# Altium PCB 6button-6neopixel.PcbDoc
Units mil, origin at the board's own origin, x right, y up, seen from the top; angles counter-clockwise.
Board outline 6000 x 3500 mil, 2 copper layers (Top Layer, Bottom Layer); 19 components, 14 nets, 56 pads, 0 vias.
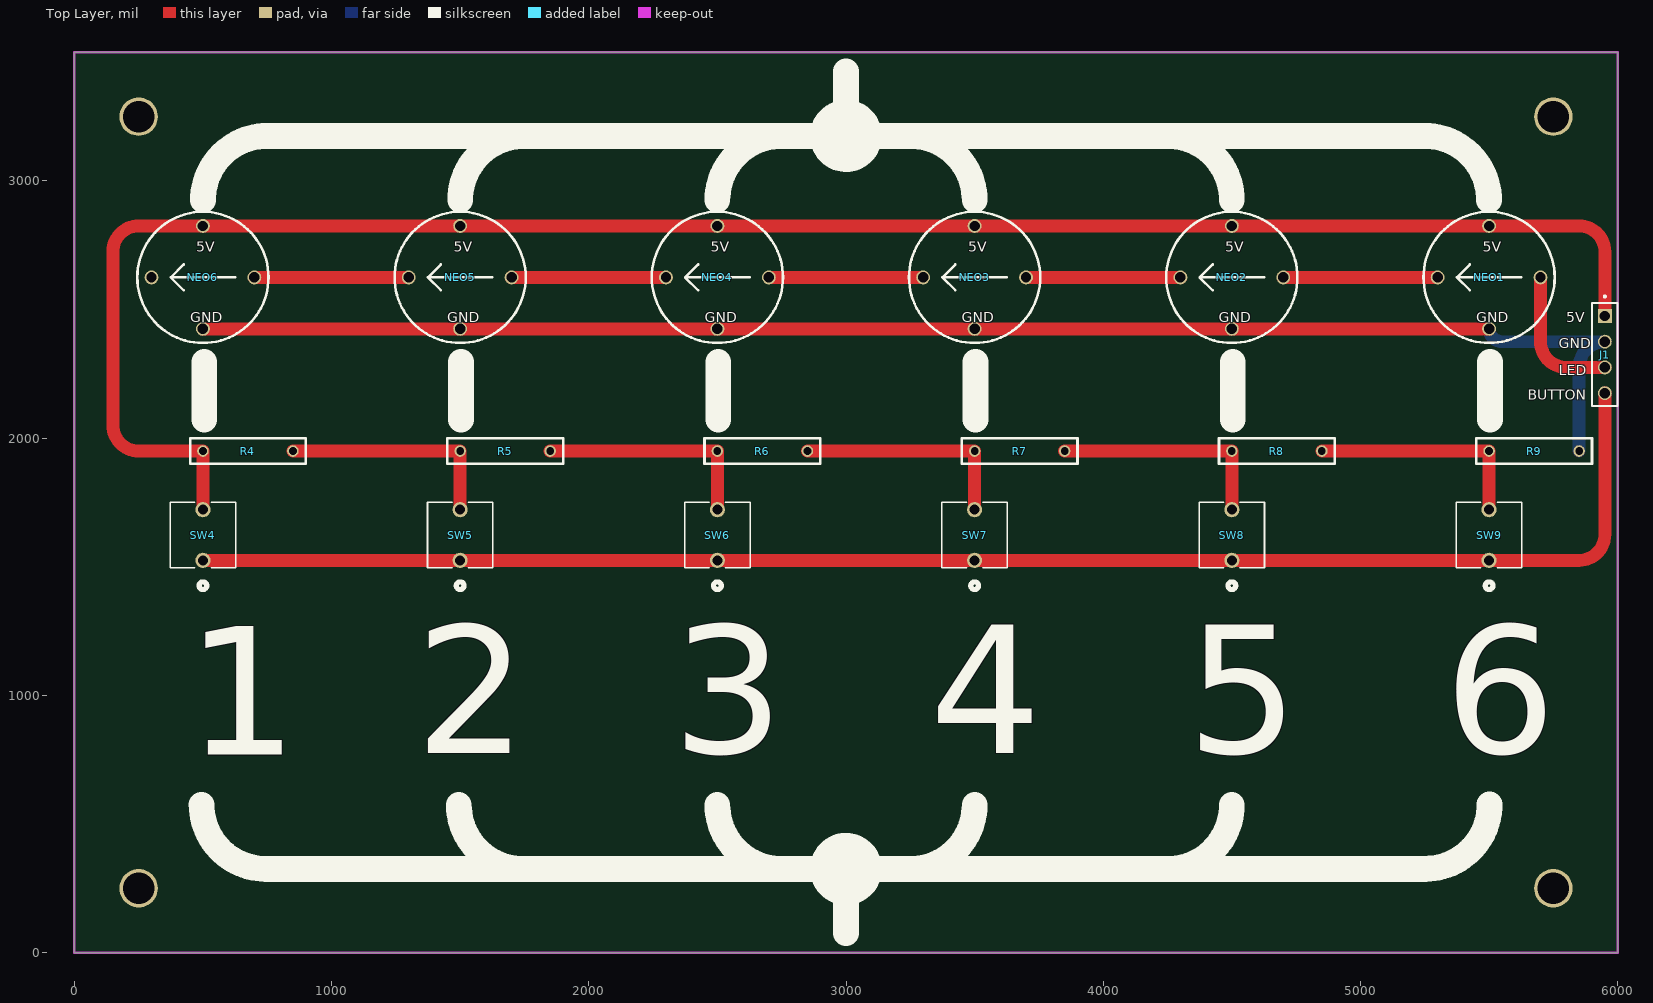
[diagram p0: Top Layer view]
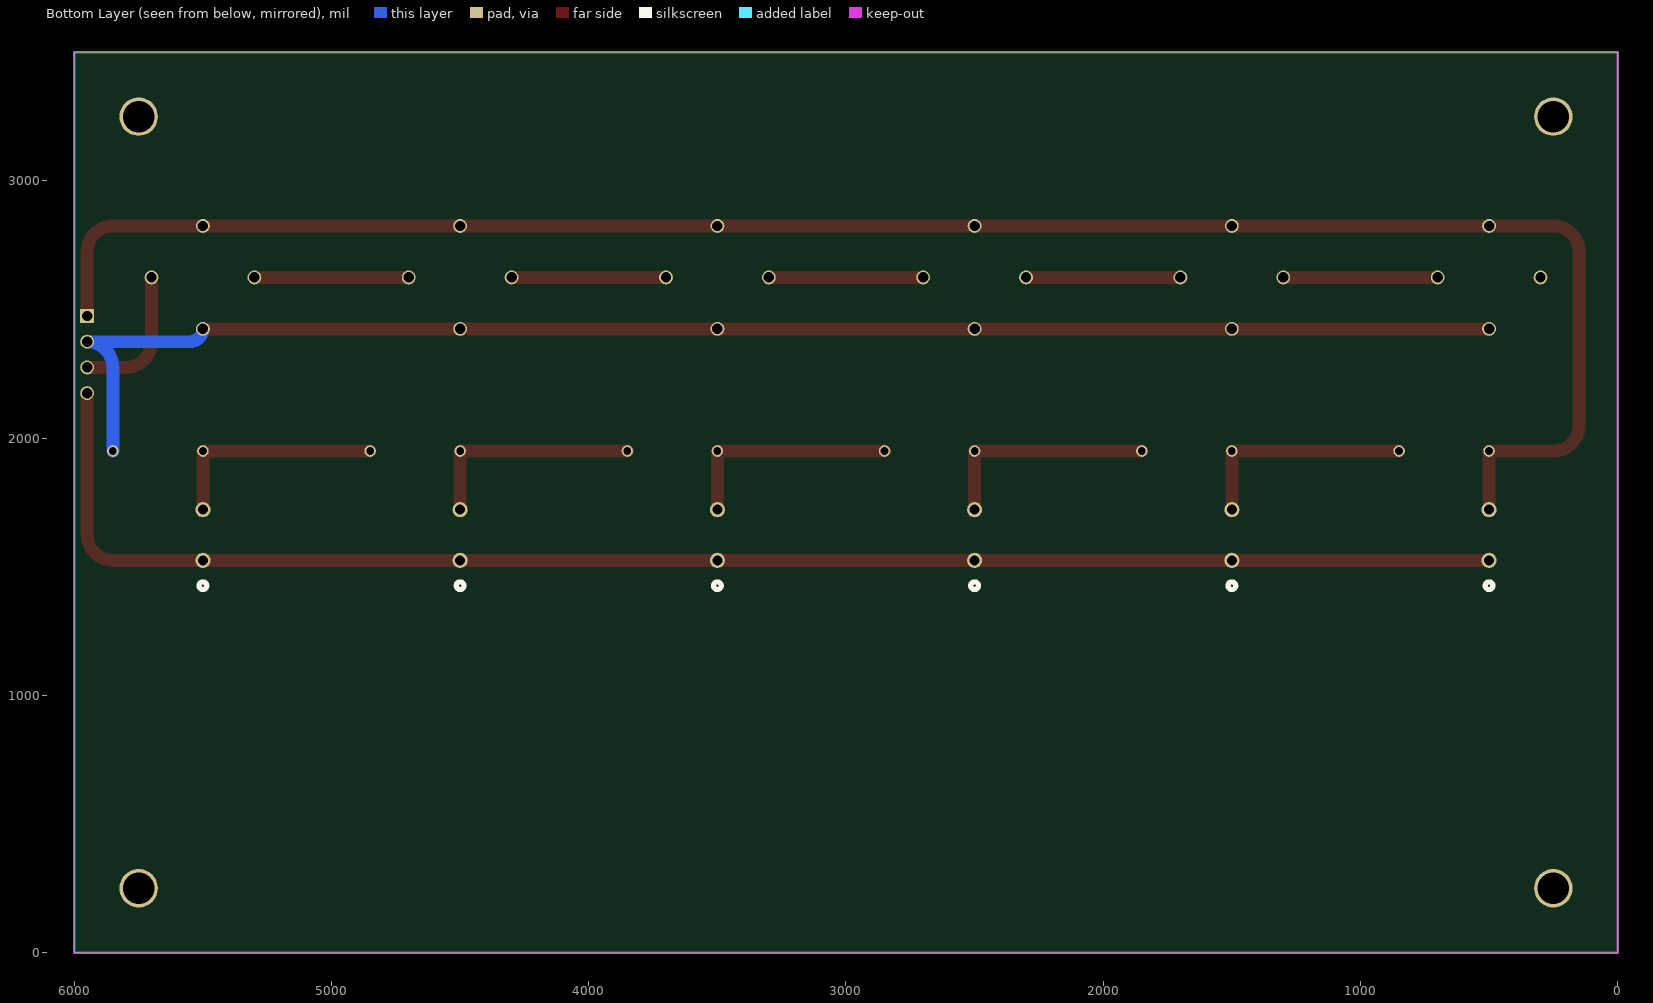
[diagram p1: Bottom Layer view, seen from below]
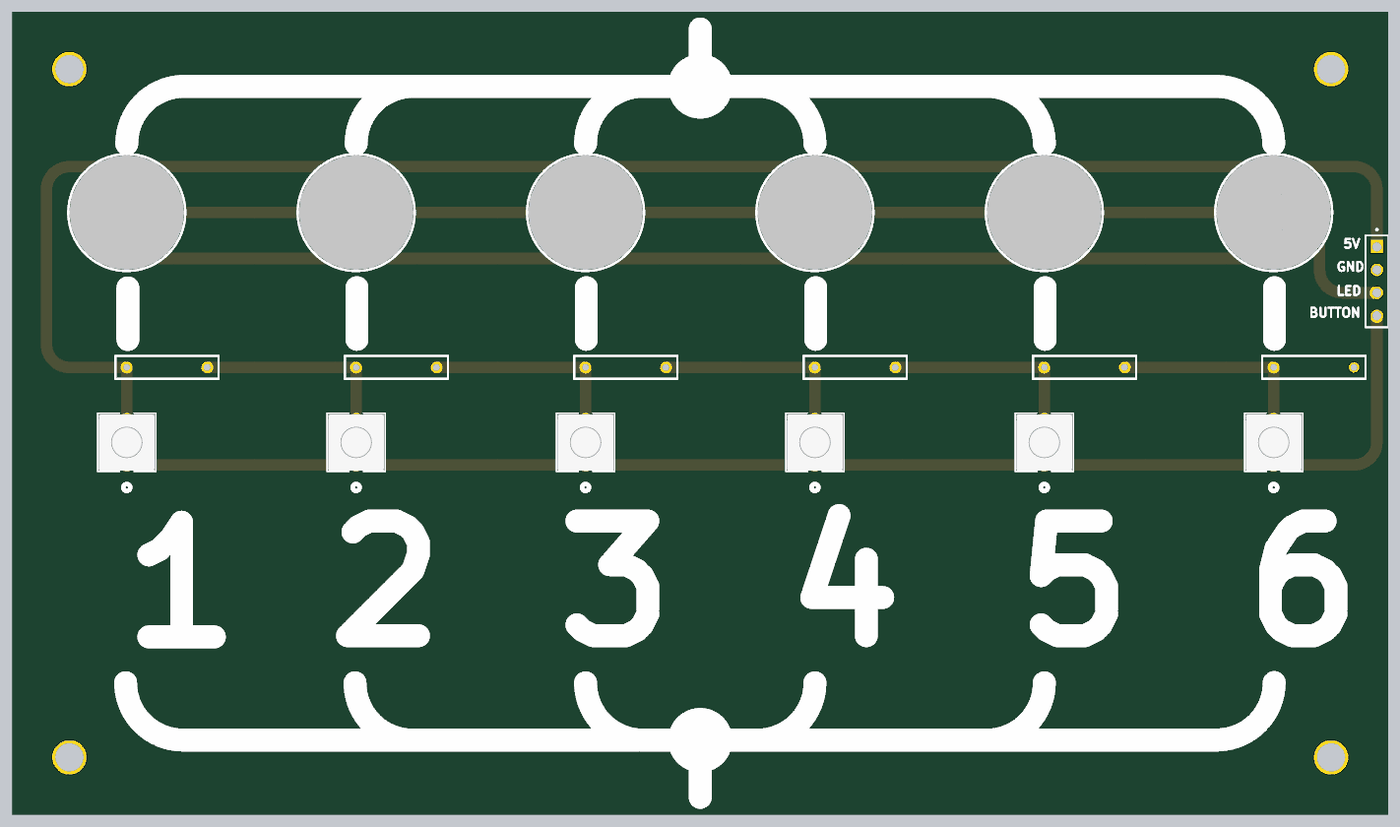
[diagram p2: 3D render of the assembled board from above, using the file's embedded part models]

## Layer stack, top to bottom
Top Solder: solder mask 0.4, Solder Resist, Dk 3.5
Top Layer: signal copper 1.4
Dielectric 1: dielectric 12.6, FR-4, Dk 4.8
Bottom Layer: signal copper 1.4
Bottom Solder: solder mask 0.4, Solder Resist, Dk 3.5

## Board outline
0,0 0,3500 6000,3500 6000,0

## Design rules (kind name [scope] priority, off if disabled: settings)
Clearance [All] p1: gap=10 ignorepadtopadclearanceinfootprint=FALSE except(0: Arc-Hole Track-Hole SMDPad-Hole THPad-Hole Via-Hole Fill-Hole Poly-Hole Region-Hole Text-Hole)
PolygonConnect [All] p1: connectstyle=Relief reliefconductorwidth=10 reliefentries=4 polygonreliefangle="90 Angle" airgapwidth=10
RoutingVias [All] p1: holewidth=28 width=50 viastyle="Through Hole" minholewidth=28 minwidth=50 maxholewidth=28 maxwidth=50
SolderMaskExpansion [All] p1: expansion=4 istentingtop=FALSE
Width [All] p1: maxlimit=150 minlimit=10 preferedwidth=50 minimp=50.000000 maximp=50.000000 favimp=50.000000
30 further rules are at their usual default settings.

## Components (designator, comment, footprint, x,y, rotation, side; value= is the part's Value field where it differs from the comment)
J1 "TSW-104-07-G-S" SAMTEC_TSW-104-07-G-S 5950,2325 r270 top
NEO1 "adafruit-1559-neopixel-flora" adafruit-1559-neopixel-flora 5500,2625 r0 top
NEO2 "adafruit-1559-neopixel-flora" adafruit-1559-neopixel-flora 4500,2625 r0 top
NEO3 "adafruit-1559-neopixel-flora" adafruit-1559-neopixel-flora 3500,2625 r0 top
NEO4 "adafruit-1559-neopixel-flora" adafruit-1559-neopixel-flora 2500,2625 r0 top
NEO5 "adafruit-1559-neopixel-flora" adafruit-1559-neopixel-flora 1500,2625 r0 top
NEO6 "adafruit-1559-neopixel-flora" adafruit-1559-neopixel-flora 500,2625 r0 top
R4 "Resistor" "thruhole resistor" 675,1950 r180 top
R5 "Resistor" "thruhole resistor" 1675,1950 r180 top
R6 "Resistor" "thruhole resistor" 2675,1950 r180 top
R7 "Resistor" "thruhole resistor" 3675,1950 r180 top
R8 "Resistor" "thruhole resistor" 4675,1950 r180 top
R9 "Resistor" "thruhole resistor" 5675,1950 r180 top
SW4 "TL59AF100Q" SW_TL59AF100Q_EWI 500,1525 r90 top
SW5 "TL59AF100Q" SW_TL59AF100Q_EWI 1500,1525 r90 top
SW6 "TL59AF100Q" SW_TL59AF100Q_EWI 2500,1525 r90 top
SW7 "TL59AF100Q" SW_TL59AF100Q_EWI 3500,1525 r90 top
SW8 "TL59AF100Q" SW_TL59AF100Q_EWI 4500,1525 r90 top
SW9 "TL59AF100Q" SW_TL59AF100Q_EWI 5500,1525 r90 top

## Footprints (in the part's own frame and the unit in brackets; to place one, negate y for a bottom-side part, rotate by r counter-clockwise, add the part's x,y. Pads: shape width x height; smd on the part's side, far side on the other; paste and mask are expansions set on the pad)
adafruit-1559-neopixel-flora [mm]
  round 1.37 hole 1.02: 5V(0,5.08) GND(0,-5.08) IN(5.08,0) OUT(-5.08,0)
  silkscreen extent -6.48,-6.48 6.48,6.48, body extent -6.35,-6.35 6.35,6.35, height 2.4
SAMTEC_TSW-104-07-G-S [mm]
  rect 1.37x1.37 / inner round 1.37 / far side rect 1.37x1.37 hole 1.02: 01(-3.81,0)
  round 1.37 hole 1.02: 02(-1.27,0) 03(1.27,0) 04(3.81,0)
  silkscreen extent -5.83,-1.27 5.08,1.27
SW_TL59AF100Q_EWI [mil]
  round 59 / inner round 60 / far side round 59 hole 39 paste-99999 mask+0: 1(0,0) 2(196.85,0)
  silkscreen extent -114,-127 225,127, body extent -24,-122 220,122, height 202
"thruhole resistor" [mil] "thruhole resistor"
  round 45 hole 30: 1(-175,0) 2(175,0)
  silkscreen extent -225,-50 225,50

## Part data
J1: "<a href=\"https://pricing.snapeda.com/parts/TSW-104-07-G-S/Samtec/view-part?ref=eda\">Check availability</a>", Package=None, Availability=Unavailable, MP=altium_native_batch, Price=None
SW4 SW5 SW6 SW7 SW8 SW9: "No Description Available", Mfr_Name=E-Switch, Copyright="Copyright (C) 2024 Ultra Librarian. All rights reserved.", Manufacturer_Part_Number=TL59AF100Q, RefDes=RefDes, Type=DEV

## Free pads (board coordinates)
  round 150 hole 123 unplated: 8(250,250) 8(250,3250) 8(5750,250) 8(5750,3250)

## Nets (pads, with @x,y where several pads share a name; then routed paths per layer and width w, separated by ;. In a path a pad name is that pad's centre, name@x,y a point inside that pad or via, vN(x,y) a via of type N, cw(c..) or ccw(c..) an arc to the next point about the centre after c; other vN are vias at no path point)
GND: J1.02 NEO1.GND NEO2.GND NEO3.GND NEO4.GND NEO5.GND NEO6.GND R9.1 | length 5960.6
  Top Layer w50: NEO6.GND NEO5.GND NEO4.GND NEO3.GND NEO2.GND NEO1.GND
  Bottom Layer w50: NEO1.GND ccw(c5550,2425) 5550,2375 J1.02 ccw(c5950,2275) 5850,2275 R9.1
NetJ1_01: J1.01 NEO1.5V NEO2.5V NEO3.5V NEO4.5V NEO5.5V NEO6.5V R4.2 SW4.2 | length 7474.4
  Top Layer w50: SW4.2 R4.2 250,1950 cw(c250,2050) 150,2050 150,2725 cw(c250,2725) 250,2825 NEO6.5V NEO5.5V NEO4.5V NEO3.5V NEO2.5V NEO1.5V 5850,2825 cw(c5850,2725) 5950,2725 J1.01
NetJ1_03: J1.03 NEO1.IN | length 557.1
  Top Layer w50: NEO1.IN 5700,2375 ccw(c5800,2375) 5800,2275 J1.03
NetJ1_04: J1.04 SW4.1 SW5.1 SW6.1 SW7.1 SW8.1 SW9.1 | length 6057.1
  Top Layer w50: SW4.1 SW5.1 SW6.1 SW7.1 SW8.1 SW9.1 5850,1525 ccw(c5850,1625) 5950,1625 J1.04
NetNEO1_OUT: NEO1.OUT NEO2.IN | length 600
  Top Layer w50: NEO2.IN NEO1.OUT
NetNEO2_OUT: NEO2.OUT NEO3.IN | length 600
  Top Layer w50: NEO3.IN NEO2.OUT
NetNEO3_OUT: NEO3.OUT NEO4.IN | length 600
  Top Layer w50: NEO4.IN NEO3.OUT
NetNEO4_OUT: NEO4.OUT NEO5.IN | length 600
  Top Layer w50: NEO5.IN NEO4.OUT
NetNEO5_OUT: NEO5.OUT NEO6.IN | length 600
  Top Layer w50: NEO6.IN NEO5.OUT
NetR4_1: R4.1 R5.2 SW5.2 | length 878.1
  Top Layer w50: R4.1 R5.2 SW5.2
NetR5_1: R5.1 R6.2 SW6.2 | length 878.1
  Top Layer w50: R5.1 R6.2 SW6.2
NetR6_1: R6.1 R7.2 SW7.2 | length 878.1
  Top Layer w50: R6.1 R7.2 SW7.2
NetR7_1: R7.1 R8.2 SW8.2 | length 878.1
  Top Layer w50: R7.1 R8.2 SW8.2
NetR8_1: R8.1 R9.2 SW9.2 | length 878.1
  Top Layer w50: R8.1 5475,1950 R9.2 5500,1900 SW9.2
pads on no net: NEO6.OUT

## Keep-outs
Keep-Out Layer:
  lines w10: 6000,925 6000,0 0,0 0,3500 6000,3500 6000,2580 6000,930

## Silkscreen, mask and mechanical layers (free items; w line width, h text height)
Top Overlay:
  circle w100: c3000,325 r90.14
  circle w100: c3000,3175 r90.14
  lines w10: 425,2575 375,2625 ; 425,2675 375,2625 ; 625,2625 375,2625 ; 1425,2575 1375,2625 ; 1425,2675 1375,2625 ; 1625,2625 1375,2625 ; 2425,2575 2375,2625 ; 2425,2675 2375,2625 ; 2625,2625 2375,2625 ; 3425,2575 3375,2625 ; 3425,2675 3375,2625 ; 3625,2625 3375,2625 ; 4425,2575 4375,2625 ; 4425,2675 4375,2625 ; 4625,2625 4375,2625 ; 5425,2575 5375,2625 ; 5425,2675 5375,2625 ; 5625,2625 5375,2625
  lines w100: 494.94,575.35 ccw(c744.94,575.35) 744.94,325.35 5252,325.05 ; 500,2925 cw(c750,2925) 750,3175 5250,3175 cw(c5250,2925) 5500,2925 ; 504.83,2071.46 504.83,2296.46 ; 1495,575 ccw(c1745,575) 1745,325 ; 1500,2925 cw(c1750,2925) 1750,3175 ; 1503.53,2072.4 1503.53,2297.4 ; 2200,3175 2950,3175 ; 2500,575 ccw(c2750,575) 2750,325 ; 2500,2925 cw(c2750,2925) 2750,3175 ; 2503.53,2072.4 2503.53,2297.4 ; 2944.94,325.35 3694.94,325.35 ; 3000,75.35 3000,325.35 ; 3000,3175.35 3000,3425.35 ; 3250,325 ccw(c3250,575) 3500,575 ; 3250,3175 cw(c3250,2925) 3500,2925 ; 3503.53,2072.4 3503.53,2297.4 ; 4250,325 ccw(c4250,575) 4500,575 ; 4250,3175 cw(c4250,2925) 4500,2925 ; 4503.53,2072.4 4503.53,2297.4 ; 5252,326 ccw(c5252,576) 5502,576 ; 5503.53,2072.4 5503.53,2297.4
  text "5V" at 475,2725 h39.37
  text "5V" at 1475,2725 h39.37
  text "5V" at 2475,2725 h39.37
  text "5V" at 3475,2725 h39.37
  text "5V" at 4475,2725 h39.37
  text "5V" at 5475,2725 h39.37
  text "GND" at 450,2450 h39.37
  text "GND" at 1450,2450 h39.37
  text "GND" at 2450,2450 h39.37
  text "GND" at 3450,2450 h39.37
  text "GND" at 4450,2450 h39.37
  text "GND" at 5450,2450 h39.37
  text "5V" at 5800,2450 h39.37
  text "GND" at 5770,2350 h39.37
  text "LED" at 5770,2245 h39.37
  text "BUTTON" at 5650,2150 h39.37
  text "2" at 1325,775 h500
  text "3" at 2325,775 h500
  text "4" at 3325,775 h500
  text "5" at 4325,775 h500
  text "6" at 5325,775 h500
  text "1" at 435,770 h500